# Altium PCB PCB1.PcbDoc
Units mil, origin at the board's own origin, x right, y up, seen from the top; angles counter-clockwise.
Board outline 3500 x 2000 mil, 2 copper layers (Top Layer, Bottom Layer), stack 61.756 mil thick; 22 components, 12 nets, 57 pads, 13 vias.
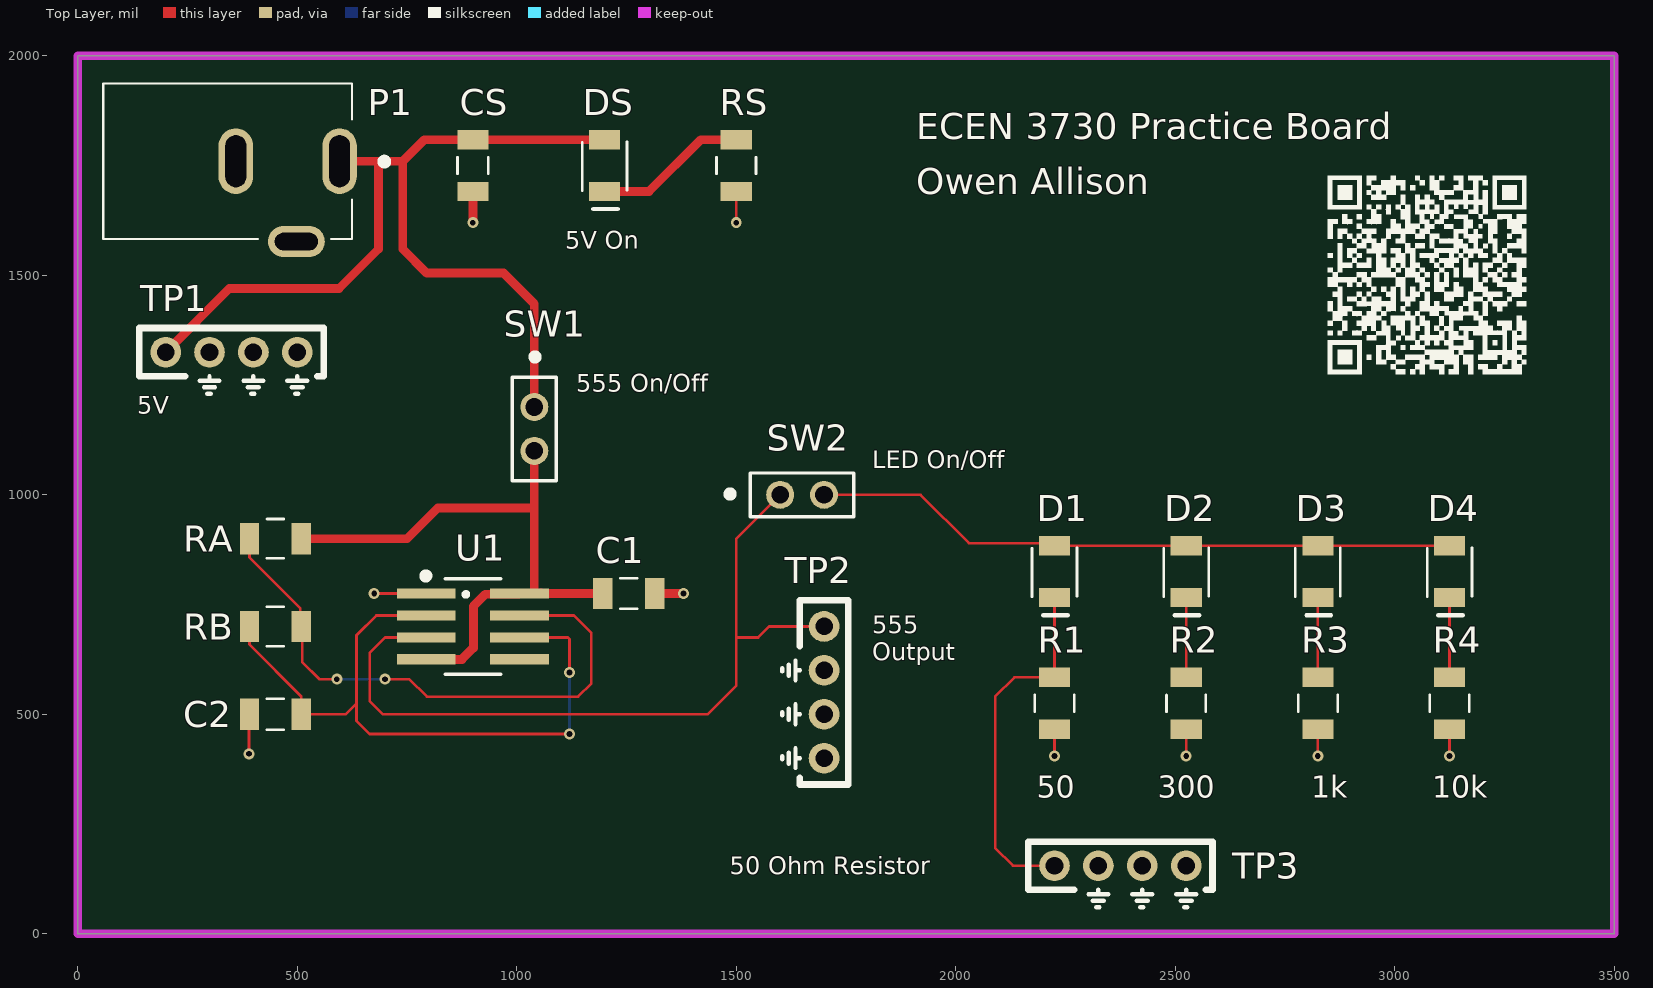
[diagram p0: Top Layer view]
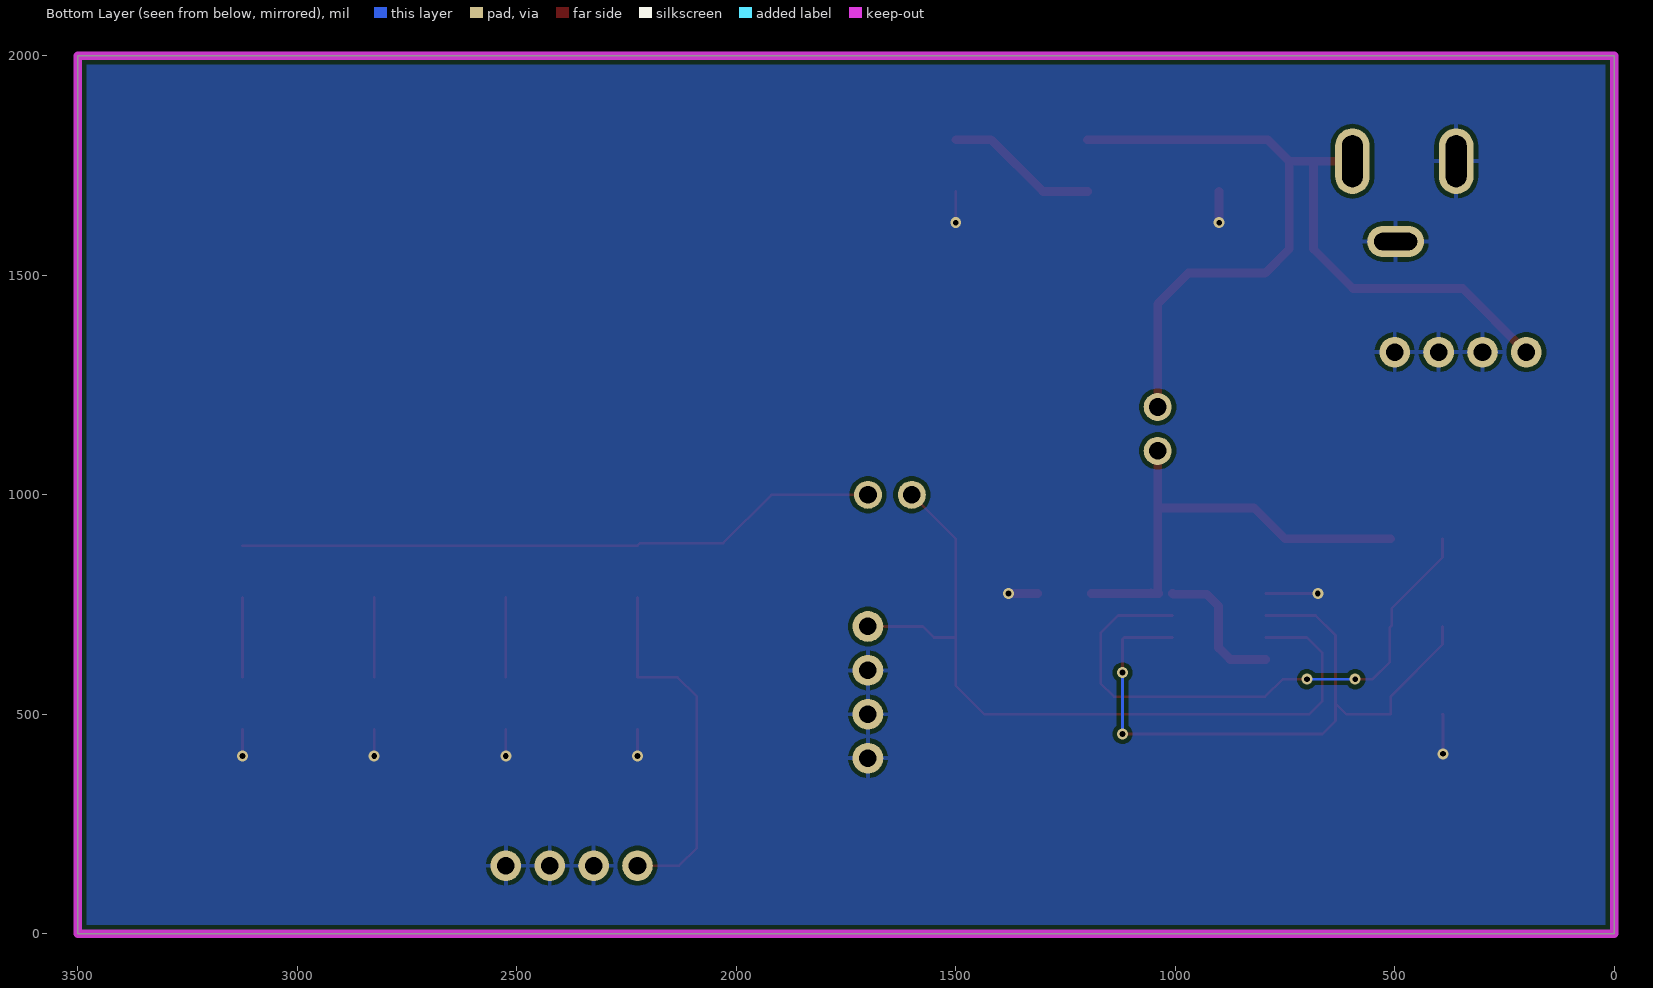
[diagram p1: Bottom Layer view, seen from below]
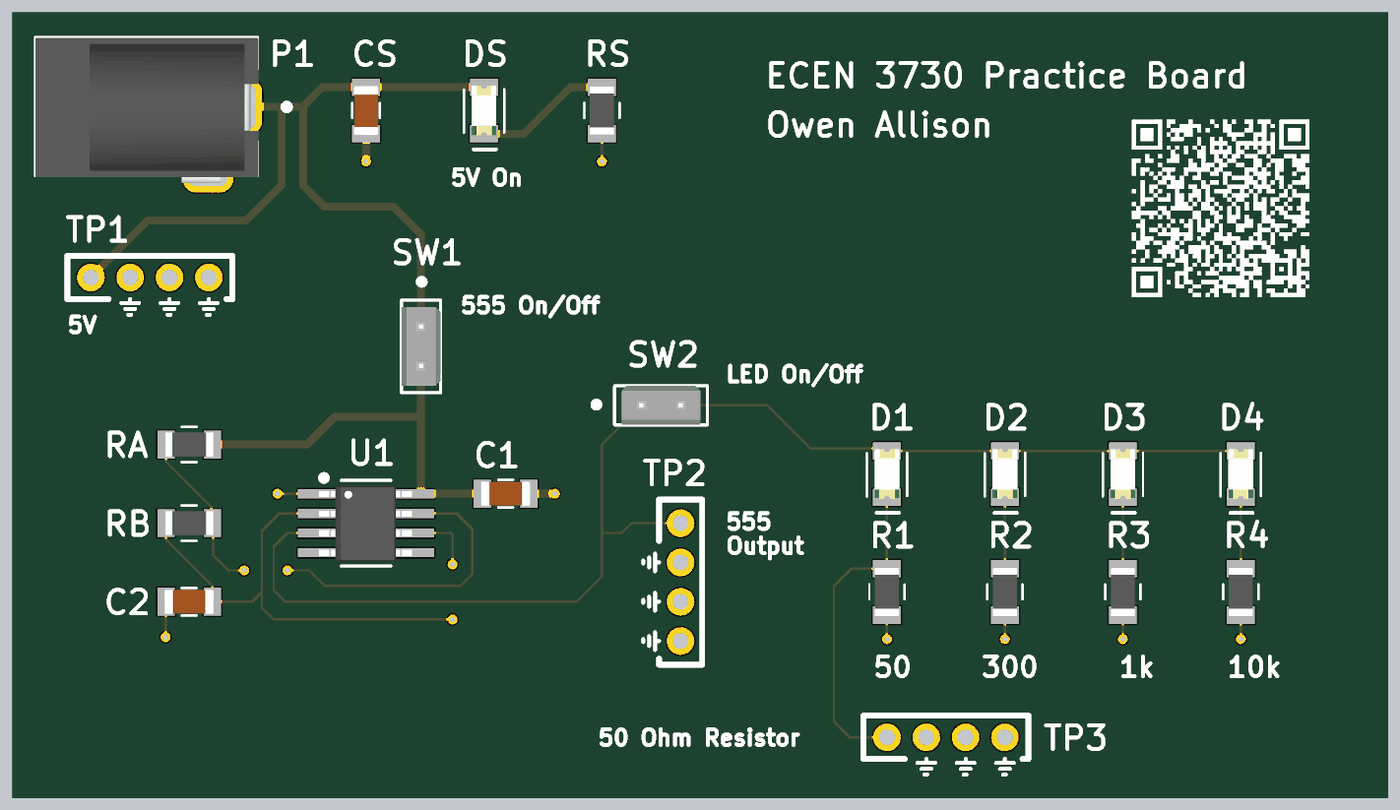
[diagram p2: 3D render of the assembled board from above, using the file's embedded part models]

## Layer stack, top to bottom
Top Solder: solder mask 1, SM-001, Dk 4
Top Layer: signal copper 1.378
Dielectric 1: core 59, Core-043, Dk 4.3
Bottom Layer: signal copper 1.378
Bottom Solder: solder mask 1, SM-001, Dk 4

## Board outline
0,0 3500,0 3500,2000 0,2000

## Design rules (kind name [scope] priority, off if disabled: settings)
BoardOutlineClearance [All] p1: gap=10 ignorepadtopadclearanceinfootprint=FALSE except(0: Arc-SplitContinuation Track-SplitContinuation SMDPad-SplitContinuation THPad-SplitContinuation Via-SplitContinuation Fill-SplitContinuation Poly-SplitContinuation Region-SplitContinuation Text-SplitContinuation)
Clearance [All] p1: gap=10 ignorepadtopadclearanceinfootprint=FALSE
PlaneClearance [All] p1: clearance=10
PlaneConnect [All] p1: planeconnectstyle=Direct reliefexpansion=20 reliefentries=4 reliefconductorwidth=10 reliefairgap=10
PolygonConnect [All] p1: thpad.connectstyle=Relief thpad.reliefconductorwidth=10 thpad.reliefentries=4 thpad.polygonreliefangle="90 Angle" thpad.airgapwidth=10 smdpad.connectstyle=Direct smdpad.reliefconductorwidth=10 smdpad.reliefentries=4 smdpad.polygonreliefangle="90 Angle" smdpad.airgapwidth=10 via.connectstyle=Direct via.reliefconductorwidth=10 via.reliefentries=4 via.polygonreliefangle="90 Angle" via.airgapwidth=10
RoutingVias [All] p1: holewidth=13 width=25 viastyle="Through Hole" minholewidth=13 minwidth=25 maxholewidth=60 maxwidth=80
SolderMaskExpansion [All] p1: expansion=4 istentingtop=FALSE
SupplyNets "Schematic Supply Nets_1" [InNet('GND')] p1: voltage=0.000
SupplyNets "Schematic Supply Nets" [InNet('+5V')] p2: voltage=0.000
UnRoutedNet [All] p1: checkbadconnections=TRUE
Width "Schematic Width Constraint_1" [InNet('NetC1_2')] p1: maxlimit=50 minlimit=10 preferedwidth=20 minimp=50.000000 maximp=50.000000 favimp=50.000000
Width "Schematic Width Constraint" [InNet('+5V')] p2: maxlimit=50 minlimit=10 preferedwidth=20 minimp=50.000000 maximp=50.000000 favimp=50.000000
Width [All] p3: maxlimit=20 minlimit=6 preferedwidth=6 minimp=50.000000 maximp=50.000000 favimp=50.000000
27 further rules are at their usual default settings.

## Components (designator, comment, footprint, x,y, rotation, side; value= is the part's Value field where it differs from the comment)
C1 "10uF" 1206_Passive_Capacitor 1255,775 r180 top
C2 "0.1uF" 1206_Passive_Capacitor 450,500 r180 top
CS "10uF" 1206_Passive_Capacitor 900,1750 r90 top
D1 "Green" LED_1206 2225,825 r270 top (schematic designator LED1)
D2 "Green" LED_1206 2525,825 r270 top (schematic designator LED2)
D3 "Green" LED_1206 2825,825 r270 top (schematic designator LED3)
D4 "Green" LED_1206 3125,825 r270 top (schematic designator LED4)
DS "Red" LED_1206 1200,1750 r270 top (schematic designator LEDS)
P1 "Power Jack" Power_Jack 596.22,1760 r180 top value="CONN PWR JACK 2X5.5MM SOLDER"
R1 "47 Ohms" 1206_Passive_Resitor 2225,525 r90 top value=47Ohm
R2 "300 Ohm" 1206_Passive_Resitor 2525,525 r90 top value=300Ohm
R3 "1k" 1206_Passive_Resitor 2825,525 r90 top value="1K Ohm"
R4 "10k" 1206_Passive_Resitor 3125,525 r90 top value=10KOhm
RA "1k" 1206_Passive_Resitor 450,900 r0 top value="1K Ohm"
RB "10k" 1206_Passive_Resitor 450,700 r0 top value=10KOhm
RS "1k" 1206_Passive_Resitor 1500,1750 r90 top value="1K Ohm"
SW1 "SW_2Pin_100mil_Switch" 2Pin-Header-Conn 1040,1200 r270 top
SW2 "SW_2Pin_100mil_Switch" 2Pin-Header-Conn 1600,1000 r0 top
TP1 "10x Probe TP" TP10x_Probe 350,1325 r0 top
TP2 "10x Probe TP" TP10x_Probe 1700,550 r270 top
TP3 "10x Probe TP" TP10x_Probe 2375,155 r0 top
U1 "NE555DR" TS555IDTTR 900,700 r0 top

## Footprints (in the part's own frame and the unit in brackets; to place one, negate y for a bottom-side part, rotate by r counter-clockwise, add the part's x,y. Pads: shape width x height; smd on the part's side, far side on the other; paste and mask are expansions set on the pad)
2Pin-Header-Conn [mm]
  round 1.62 hole 1.02: 1(0,0) 2(2.54,0)
  silkscreen extent -3.03,-1.27 4.26,1.26, body extent -1.27,-1.27 3.81,1.27, height 8.13
1206_Passive_Capacitor [mil]
  rect 44x71 smd: 1(-59,0) 2(59,0)
  silkscreen extent -19,-35 19,35, body extent -63,-31 63,32, height 50
1206_Passive_Resitor [mil]
  rect 44x71 smd: 1(-59,0) 2(59,0)
  silkscreen extent -19,-45 19,45, body extent -61,-31 61,31, height 26
LED_1206 [mil]
  rect 44x71 smd: 1(-59,0) 2(59,0)
  silkscreen extent -54,-51 99,51, body extent -63,-31 63,31, height 28
Power_Jack [mm]
  oval 2x3.8 hole 1.2 slot 3 at 90 deg: 1(0,0) 2(6,0)
  oval 3.3x1.8 hole 1 slot 2.5 at 0 deg: 3(2.5,4.65)
  silkscreen extent -2.79,-4.5 13.68,4.5, body extent -0.76,-4.45 13.64,4.95, height 11.49
TP10x_Probe [mil] "Small Probs footprint"
  round 70 hole 40: 1(-150,0) 2(-50,0) 2(50,0) 2(150,0)
  silkscreen extent -210,-95 210,55
TS555IDTTR [mm] "IC OSC Single Timer 2.7MHz 8SOIC"
  rect 3.4x0.6 smd: 1(-2.7,1.905) 2(-2.7,0.635) 3(-2.7,-0.635) 4(-2.7,-1.905) 5(2.7,-1.905) 6(2.7,-0.635) 7(2.7,0.635) 8(2.7,1.905)
  silkscreen extent -2.85,-2.77 1.6,3.05, body extent -3.03,-2.48 2.96,2.43, height 1.75

## Part data
C1 CS: library part C_10uF_1206, "10uF ±10% 50V X5R 1206 Multilayer Ceramic Capacitors MLCC - SMD/SMT RoHS", LCSC Part#=C13585, MFR Part #=CL31A106KBHNNNE, Datasheet=https://datasheet.lcsc.com/lcsc/1810221112_Samsung-Electro-Mechanics-CL31A106KBHNNNE_C13585.pdf, Type=Basic
C2: library part C_1uF_1206, "MULTILAYER CERAMIC CAPACITORS MLCC - SMD/SMT 1UF 50V 1206 ROHS", LCSC Part#=C1848, MFR Part #=CL31B105KBHNNNE, Digikey Link=https://www.digikey.com/product-detail/en/C1206C105M4RACTU/399-8150-1-ND/3471873/?itemSeq=304982366, Type=Basic
D1 D2 D3 D4: library part LED_GREEN_1206, "Green 513~528nm 1206 Light Emitting Diodes (LED) RoHS", LCSC Part#=C434439, MFR Part #=SZYY1206G, Datasheet=https://datasheet.lcsc.com/lcsc/2006301532_Yongyu-Photoelectric-SZYY1206G_C434439.pdf, Type=Extended
DS: library part LED_RED_1206, "Red 621~631nm 1206 Light Emitting Diodes (LED) RoHS", LCSC Part#=C93133, MFR Part #=15-21/R6C-FQ1R1B/2T, Datasheet=https://datasheet.lcsc.com/szlcsc/1811151241_Everlight-Elec-15-21-R6C-FQ1R1B-2T_C93133.pdf, Type=Extended
P1: library part "P_Power Jack", "Power Barrel Connector Jack 2.10mm ID (0.083\"), 5.50mm OD (0.217\") Through Hole, Right Angle", LCSC Part#=C136744, MFR Part #=PJ-102A, Digikey Link=https://www.digikey.com/product-detail/en/PJ-102A/CP-102A-ND/275425/?itemSeq=304982367, Type=Extended
R1: library part R_47Ohm_1206, "47Ω ±5% 0.25W ±200ppm/℃ 1206 Chip Resistor - Surface Mount RoHS", LCSC Part#=C25384, MFR Part #=1206W4J0470T5E, Datasheet=https://datasheet.lcsc.com/lcsc/1811101020_UNI-ROYAL-Uniroyal-Elec-1206W4J0470T5E_C25384.pdf, Type=Extended
R2: library part R_300Ohm_1206, "CHIP RESISTOR - SURFACE MOUNT 300OHMS ±1% 1/4W 1206 ROHS", LCSC Part#=C17887, MFR Part #=1206W4F3000T5E, Datasheet=https://datasheet.lcsc.com/szlcsc/Uniroyal-Elec-1206W4F3000T5E_C17887.pdf, Type=Basic
R3 RA RS: library part R_1K_1206, "CHIP RESISTOR - SURFACE MOUNT 1KOHMS ±1% 1/4W 1206 ROHS", LCSC Part#=C4410, MFR Part #=RNCP1206FTD1K00CT, Digikey Link=https://www.digikey.com/product-detail/en/RNCP1206FTD1K00/RNCP1206FTD1K00CT-ND/2240675/?itemSeq=304982373, Type=Basic
R4 RB: library part R_10KOhm_1206, "10 kOhms ±5% 0.25W, 1/4W Chip Resistor 1206 (3216 Metric) Automotive AEC-Q200 Thick Film", LCSC Part#=C17902, MFR Part #=RMCF1206FT10K0, Digikey Link=https://www.digikey.com/en/products/detail/stackpole-electronics-inc/RMCF1206FT10K0/1759669, Type=Basic
SW1 SW2: "2Pin Header", LCSC Part#=C124375, Type=Extended
TP1 TP2 TP3: library part TP_10x_Probe, "Test Point 300 mil centers"
U1: library part U_555_Slow, "555 Timer SOIC-8_150MIL ROHS 150ns Rise Time", LCSC Part#=C7593, Digikey Link=https://www.digikey.com/product-detail/en/texas-instruments/NE555DR/296-6501-1-ND/372490, MFR Part #=NE555DR, Type=Basic

## Via types
v1: diameter 25, hole 13, Top Layer to Bottom Layer, 13 vias

## Nets (pads, with @x,y where several pads share a name; then routed paths per layer and width w, separated by ;. In a path a pad name is that pad's centre, name@x,y a point inside that pad or via, vN(x,y) a via of type N, cw(c..) or ccw(c..) an arc to the next point about the centre after c; other vN are vias at no path point)
+5V: CS.2 DS.1 P1.1 SW1.1 TP1.1 | length 2193.2
  Top Layer w20: TP1.1 345,1470 595,1470 685,1560 685,1760 ; P1.1 685,1760 ; SW1.1 1040,1435 970,1505 795,1505 740,1560 740,1760 ; DS.1 CS.2 789,1809 740,1760 ; 685,1760 740,1760
GND: C1.1 C2.2 CS.1 P1.2 P1.3 R1.1 R2.1 R3.1 R4.1 RS.1 TP1.2 TP2.2 TP3.2 U1.1 | length 661.7
  Top Layer w6: v1(390,410) 390,500 C2.2 ; v1(675,775) U1.1 ; v1(1500,1620) RS.1 ; v1(2225,405) R1.1 ; v1(2525,405) R2.1 ; v1(2825,405) R3.1 ; v1(3125,405) R4.1
  Top Layer w20: v1(900,1620) CS.1 ; C1.1 v1(1380,775)
NetC1_2: C1.2 RA.2 SW1.2 U1.4 U1.8 | length 1371.5
  Top Layer w20: RA.2 750,900 820,970 1040,970 ; U1.4 875,625 901.12,651.12 901.12,746.12 928.19,773.19 1004.49,773.19 U1.8 ; SW1.2 1040,970 ; U1.8@1055,776.81 U1.8@1053.19,775 ; C1.2@1191,775 U1.8@1053.19,775 ; 1040,970 1040,776.81 1038.19,775 U1.8@1053.19,775
NetC2_1: C2.1 RB.1 U1.2 U1.6 | length 1586.7
  Top Layer w6: RB.1 391,691 390.99,659.01 509,541 C2.1 610,500 635,525 ; U1.2 680,725 635,680 635,525 ; U1.6 1116.49,675 1120,671.49 v1(1120,595) ; v1(1120,455) 665,455 635,485 635,525
  Bottom Layer w6: v1(1120,455) v1(1120,595)
NetD1_1: D1.1 D2.1 D3.1 D4.1 SW2.2 | length 1473
  Top Layer w6: SW2.2 1920,1000 2030,890 2219,890 D1.1 D2.1 D3.1 D4.1
NetD1_2: D1.2 R1.2 TP3.1 | length 831.8
  Top Layer w6: TP3.1 2130,155 2090,195 2090,540 2134,584 R1.2 D1.2
NetD2_2: D2.2 R2.2 | length 182
  Top Layer w6: R2.2 D2.2
NetD3_2: D3.2 R3.2 | length 182
  Top Layer w6: R3.2 D3.2
NetD4_2: D4.2 R4.2 | length 182
  Top Layer w6: R4.2 D4.2
NetDS_2: DS.2 RS.2 | length 348.9
  Top Layer w20: DS.2 1301,1691 1419,1809 RS.2
NetRA_1: RA.1 RB.2 U1.7 | length 1330.1
  Top Layer w6: RA.1 391,857 507.01,740.99 507.01,701.99 510.99,698.01 510.99,619.01 550,580 v1(590,580) ; v1(700,580) 755,580 795,540 1140,540 1170,570 1170,685 1130,725 U1.7
  Bottom Layer w6: v1(590,580) v1(700,580)
NetSW2_1: SW2.1 TP2.1 U1.3 | length 1814.3
  Top Layer w6: U1.3 700,675 665,640 665,530 695,500 1435,500 1500,565 1500,675 ; SW2.1 1500,900 1500,675 ; TP2.1 1575,700 1550,675 1500,675
pads on no net: U1.5

## Polygon pours and split planes (outlines as drawn)
GND on Bottom Layer "GND_L02_P000" (solid, pour order 0): 0,2000 3500,2000 3500,0 0,0

## Keep-outs
Keep-Out Layer:
  the board outline again, w20

## Silkscreen, mask and mechanical layers (free items; w line width, h text height)
Top Overlay:
  drawing of 86 lines, arcs and shapes, not listed
  text "ECEN 3730 Practice Board" at 1910,1810 h60
  text "Owen Allison" at 1910,1685 h60
  text "5V On" at 1110,1560 h40
  text "555 On/Off" at 1135,1235 h40
  text "5V" at 135,1185 h40
  text "LED On/Off" at 1810,1060 h40
  text "555" at 1810,685 h40
  text "Output" at 1810,623.33 h40
  text "50" at 2185,310 h50
  text "300" at 2460,310 h50
  text "1k" at 2810,310 h50
  text "10k" at 3085,310 h50
  text "50 Ohm Resistor" at 1485,135 h40